# Altium PCB Temp_sense_Project 2.0(right angle.PcbDoc (part 3 of 5)
Units mm, origin at the board's own origin, x right, y up, seen from the top; angles counter-clockwise.
Board outline 238.12 x 109.47 mm, 4 copper layers (Top Layer, Layer 1, Layer 2, Bottom Layer), stack 0.603 mm thick; 185 components, 161 nets, 944 pads, 283 vias.
Unrouted connection lines stored in the file: 2.
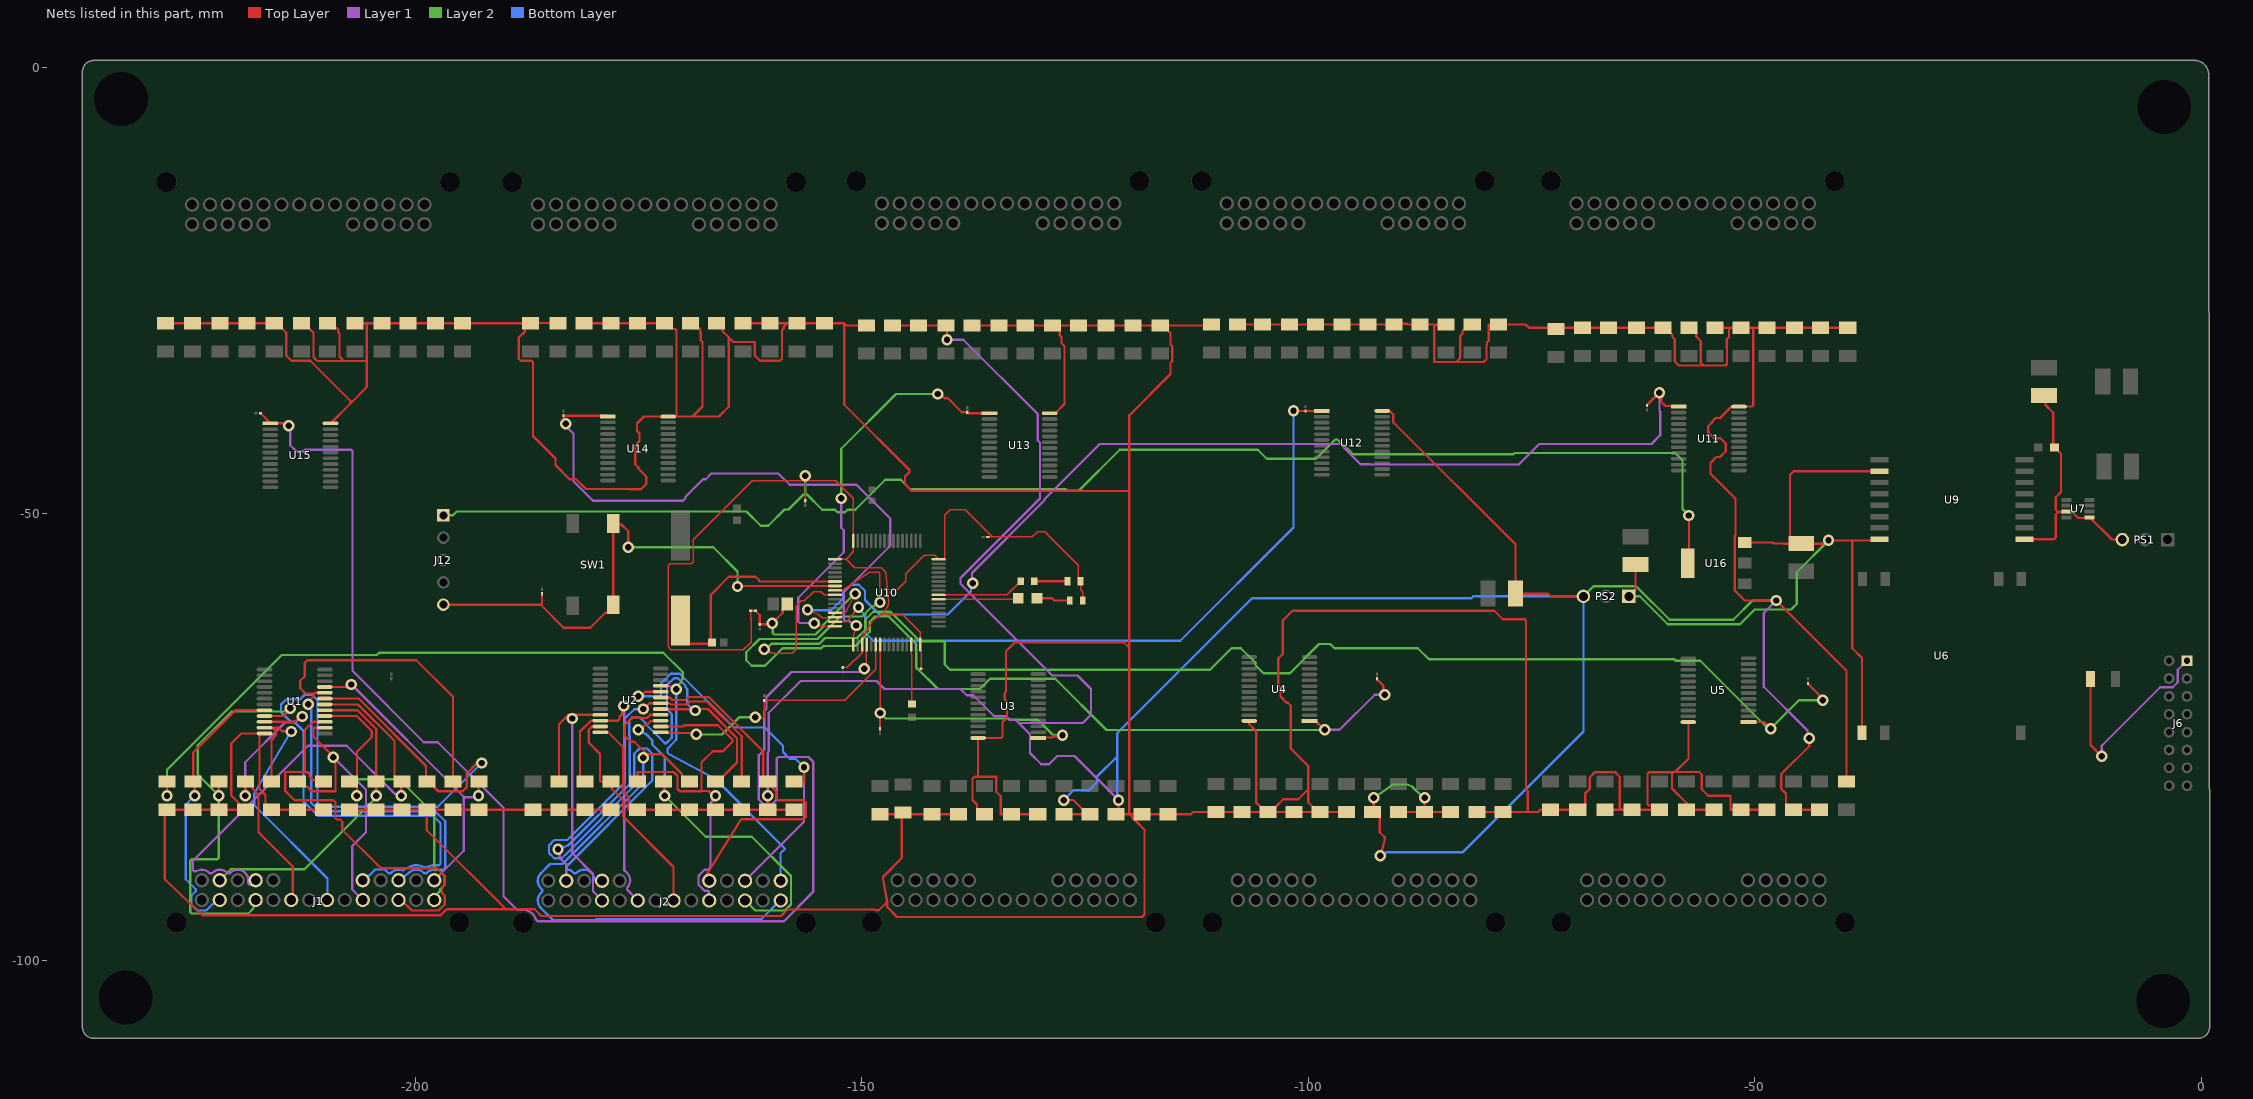
[diagram p4: the nets of this part, all layers, seen from the top]

## Via types
v1: diameter 1.27, hole 0.711, Top Layer to Bottom Layer, 278 vias
v2: diameter 0.711, hole 0.711, Top Layer to Bottom Layer, 4 vias
v3: diameter 1, hole 0.711, Top Layer to Bottom Layer, 1 vias

## Nets (pads, with @x,y where several pads share a name; then routed paths per layer and width w, separated by ;. In a path a pad name is that pad's centre, name@x,y a point inside that pad or via, vN(x,y) a via of type N, cw(c..) or ccw(c..) an arc to the next point about the centre after c; other vN are vias at no path point) (continued)
NetC4_1: C4.1 U2.1 U10.22 | length 30.9
  Top Layer w0.15: v1(-161.916,-72.78) -161.853,-72.843 -160.988,-72.843 -160.9,-72.755 C4.1@-160.9,-70.876 -151.987,-70.876 -151.925,-70.876 -151.461,-70.419 ccw(c-152.137,-69.732) -151.454,-70.412 -148.454,-67.405 -148.454,-65.313 -148.448,-65.307 U10.22@-148.448,-64.785
  Top Layer w0.254: U2.1@-172.511,-74.45 -172.43,-74.53 -168.675,-74.53 v1(-168.52,-74.685)
  Layer 2 w0.254: v1(-168.52,-74.685) -165.627,-74.685 -163.722,-72.78 v1(-161.916,-72.78)
NetC5_1: C5.1 U3.1 U10.23 | length 33.7
  Top Layer w0.15: v1(-147.94,-72.297) U10.23@-147.94,-64.616
  Top Layer w0.254: C5.1@-147.946,-74.05 -147.946,-73.389 -147.94,-73.382 v1(-147.94,-72.297) ; U3.1@-130.22,-75.085 -130.158,-75.024 -128.672,-75.024 -128.545,-74.897 -127.643,-74.897 v1(-127.529,-74.782)
  Layer 2 w0.254: v1(-147.94,-72.297) -147.911,-72.297 -147.312,-72.896 -133.566,-72.896 -133.428,-73.034 -130.293,-73.034 -128.689,-74.637 -128.615,-74.712 v1(-127.529,-74.782)
NetC6_1: C6.1 U4.1 U10.8 | length 115.4
  Top Layer w0.15: U10.8@-152.99,-58.566 -152.34,-58.566 -152.141,-58.545 -149.16,-56.534 -148.095,-56.534 -148.007,-56.622 v1(-147.944,-59.892)
  Top Layer w0.254: U4.1@-99.867,-73.18 -99.198,-73.18 -98.201,-74.177 v1(-98.162,-74.177) ; C6.1@-92.32,-68.463 -92.32,-68.508 -91.604,-69.224 -91.604,-70.067 v1(-91.431,-70.24)
  Layer 1 w0.254: v1(-98.162,-74.177) -96.511,-74.177 -92.574,-70.24 v1(-91.431,-70.24)
  Layer 2 w0.254: v1(-147.944,-59.892) -148.219,-59.892 -148.788,-60.461 -148.922,-60.461 -149.938,-61.477 -152.408,-61.477 -154.948,-64.017 -161.448,-64.017 -162.916,-65.485 -162.916,-66.399 -162.321,-66.994 -160.821,-66.994 -158.86,-65.033 -154.527,-65.033 -154.273,-64.779 -150.691,-64.779 -149.102,-63.19 -149.102,-63.137 -149.089,-63.124 -149.089,-62.065 -148.501,-61.477 -146.979,-61.477 -143.882,-64.574 -143.882,-67.192 -141.469,-69.605 -136.783,-69.605 -135.64,-68.462 -128.341,-68.462 -122.6,-74.202 -98.187,-74.202 v1(-98.162,-74.177)
NetC7_1: C7.1 U5.1 U10.9 | length 153.2
  Top Layer w0.15: v1(-160.9,-65.16) -160.604,-65.16 -160.144,-65.62 -157.789,-65.62 -157.343,-65.174 -157.343,-60.941 -157.343,-60.316 -156.778,-59.751 -156.413,-59.751 -155.369,-58.707 -154.564,-58.707 -154.205,-59.066 U10.9@-152.99,-59.066
  Top Layer w0.254: U5.1@-50.718,-73.307 -48.994,-73.307 v1(-48.251,-74.05) ; C7.1@-44.06,-68.971 -44.06,-69.016 -42.409,-70.667 v1(-42.409,-70.875)
  Layer 2 w0.254: v1(-160.9,-65.16) -160.733,-65.16 -160.098,-64.525 -154.737,-64.525 -154.101,-63.888 -150.519,-63.888 -149.597,-62.966 -149.597,-61.854 -148.712,-60.969 -146.769,-60.969 -143.467,-64.271 -140.856,-64.271 -140.707,-64.42 -140.707,-66.851 -140.112,-67.446 -111.017,-67.446 -108.604,-65.033 -107.556,-65.033 -106.193,-66.396 -105.909,-66.68 -105.909,-66.934 -105.016,-67.827 -102.059,-67.827 -98.799,-64.567 -97.537,-64.567 -97.071,-65.033 -87.744,-65.033 -86.496,-66.281 -59.006,-66.281 -58.857,-66.43 -56.125,-66.43 -48.505,-74.05 v1(-48.251,-74.05) -45.076,-70.875 v1(-42.409,-70.875)
NetC8_1: C8.1 U10.14 U11.1 | length 125.1
  Top Layer w0.15: v1(-156.074,-60.715) -156.074,-60.776 v1@-156.104,-60.806 ; U10.14@-153.153,-61.558 -153.17,-61.575 -153.759,-61.575 -153.788,-61.604 -154.318,-61.604 -154.423,-61.604 -154.889,-61.208 ; v1@-156.104,-60.806 -154.889,-61.208 ; v1@-156.104,-60.806 -154.889,-61.208
  Top Layer w0.254: C8.1@-62.094,-37.855 -62.09,-37.85 -62.09,-37.805 -60.743,-36.458 v1(-60.697,-36.458) -60.503,-36.652 -60.503,-37.44 -60.021,-37.922 -58.605,-37.922 U11.1@-58.538,-37.989
  Layer 1 w0.254: v1(-137.569,-57.758) -137.659,-57.668 -137.659,-56.615 -129.531,-48.487 -129.531,-48.356 -123.348,-42.173 -96.406,-42.173 -94.149,-44.43 -93.107,-44.43 -93.078,-44.459 -76.434,-44.459 -74.148,-42.173 -61.586,-42.173 -60.595,-41.182 -60.595,-38.547 -60.697,-38.445 v1(-60.697,-36.458)
  Bottom Layer w0.254: v1(-156.074,-60.715) -156,-60.789 -153.406,-60.789 -152.056,-59.439 -152.056,-58.816 -151.161,-57.921 -150.319,-57.921 -149.629,-58.611 -149.629,-59.644 -148.005,-61.267 -140.37,-61.267 -137.763,-58.66 -137.763,-57.952 v1(-137.569,-57.758)
NetC9_1: C9.1 U10.15 U12.1 | length 89
  Top Layer w0.15: U10.15@-152.99,-62.066 -151.725,-62.066 -151.665,-62.066 -151.577,-61.978 v1(-150.359,-60.461)
  Top Layer w0.254: v1(-101.667,-38.471) U12.1@-98.489,-38.471 ; v1(-101.667,-38.471) U12.1@-98.489,-38.471 ; v1(-101.667,-38.471) C9.1@-100.321,-38.471 ; v1(-101.667,-38.471) C9.1@-100.321,-38.471 ; v1(-101.667,-38.471) C9.1@-100.321,-38.471 ; C9.1@-100.321,-38.471 U12.1@-98.489,-38.471 ; C9.1@-100.321,-38.471 U12.1@-98.489,-38.471 ; C9.1@-100.321,-38.471 U12.1@-98.489,-38.471
  Bottom Layer w0.254: v1(-150.359,-60.461) -150.359,-60.592 -149.597,-61.354 -149.597,-63.295 -148.697,-64.195 -114.328,-64.195 -101.667,-51.534 v1(-101.667,-38.471)
NetC10_1: C10.1 U10.16 U13.1 | length 51
  Top Layer w0.15: v1(-155.31,-62.224) -155.035,-62.224 -154.661,-62.597 -153.585,-62.597 -153.585,-62.587 -153.011,-62.587 U10.16@-152.99,-62.566
  Top Layer w0.254: v1(-141.476,-36.585) -141.202,-36.585 -140.719,-37.068 -140.343,-37.068 -138.793,-38.618 C10.1@-138.171,-38.618 ; C10.1@-138.171,-38.663 C10.1@-138.171,-38.618 ; C10.1@-138.171,-38.663 -138.167,-38.668 C10.1@-138.167,-38.725 ; C10.1@-138.171,-38.663 C10.1@-138.171,-38.618 ; C10.1@-138.171,-38.663 C10.1@-138.171,-38.618 ; C10.1@-138.167,-38.725 U13.1@-135.7,-38.725 ; C10.1@-138.167,-38.725 U13.1@-135.7,-38.725 ; C10.1@-138.167,-38.725 U13.1@-135.7,-38.725
  Layer 1 w0.254: v1(-155.31,-62.224) -156.941,-62.224 -157.09,-62.075 -157.09,-59.382 -152.01,-54.302 -152.01,-51.824 -152.284,-51.55 v1(-152.284,-48.269)
  Layer 2 w0.254: v1(-152.284,-48.269) -152.284,-42.701 -146.168,-36.585 v1(-141.476,-36.585)
NetC11_1: C11.1 U10.17 U14.1 | length 86.2
  Top Layer w0.15: U10.17@-150.94,-64.616 -150.94,-63.966 -150.919,-63.768 v1(-150.613,-62.493)
  Top Layer w0.254: v1(-183.139,-39.924) -183.139,-39.649 -183.383,-39.405 -183.383,-39.048 -183.379,-39.044 C11.1@-183.379,-39.022 ; U14.1@-178.413,-39.106 -178.493,-39.026 -179.307,-39.026 -179.311,-39.022 ; C11.1@-183.379,-39.022 -179.311,-39.022 ; C11.1@-183.379,-39.022 -179.311,-39.022 ; C11.1@-183.379,-39.022 -179.311,-39.022 ; C11.1@-183.379,-39.022 -179.311,-39.022 ; C11.1@-183.379,-39.022 -179.311,-39.022
  Layer 1 w0.254: v1(-183.139,-39.924) -183.139,-40.15 -182.259,-41.03 -182.259,-46.341 -180.077,-48.523 -170.004,-48.523 -169.723,-48.242 -169.723,-48.079 -167.754,-46.11 -167.464,-46.11 -166.829,-45.475 -159.336,-45.475 -158.066,-46.745 -150.573,-46.745 -146.803,-50.515 -146.803,-53.563 -152.01,-58.77 -152.01,-61.802 -151.83,-61.982 -151.399,-61.982 -150.888,-62.493 v1(-150.613,-62.493)
NetC12_1: C12.1 U10.20 U15.1 | length 165.6
  Top Layer w0.15: v1(-149.724,-67.319) -149.51,-67.105 -149.51,-66.711 -149.47,-66.671 -149.47,-65.431 -149.448,-65.41 -149.448,-64.796 U10.20@-149.432,-64.779
  Top Layer w0.254: C12.1@-217.287,-38.744 -216.272,-39.759 -216.272,-39.814 U15.1@-216.157,-39.93 ; v1(-214.148,-40.142) -214.423,-40.142 -214.697,-39.868 U15.1@-216.095,-39.868 ; U15.1@-216.157,-39.93 U15.1@-216.095,-39.868 ; U15.1@-216.157,-39.93 U15.1@-216.095,-39.868 ; U15.1@-216.157,-39.93 U15.1@-216.095,-39.868
  Layer 1 w0.254: v1(-214.148,-40.142) -213.986,-40.304 -213.986,-42.304 -213.317,-42.973 -212.475,-42.973 -212.31,-42.808 -207.15,-42.808 -207.001,-42.957 -207.001,-67.573 -199.02,-75.554 -197.465,-75.554 -190.11,-82.909 -190.11,-92.795 -188.592,-94.314 -188.585,-94.32 -188.375,-94.32 ; v1(-149.724,-67.319) -150.105,-67.7 -157.852,-67.7 -160.646,-70.494 -160.646,-71.808 -160.9,-72.062 -160.9,-76.399 -161.535,-77.034 -161.535,-81.964 -160.94,-82.559 -160.098,-82.559 -159.503,-81.964 -159.503,-77.374 -159.354,-77.225 -155.947,-77.225 -155.439,-77.733 -155.439,-92.338 -158.69,-95.589 -186.241,-95.589 -186.296,-95.589 -186.445,-95.44 -186.574,-95.17 ; -188.375,-94.32 -187.929,-94.319 ; -188.375,-94.32 -187.929,-94.319 ; -188.375,-94.32 -187.929,-94.319 ; -187.929,-94.319 cw(c-187.926,-95.818) -186.574,-95.17 ; -187.929,-94.319 cw(c-187.926,-95.818) -186.574,-95.17 ; -187.929,-94.319 cw(c-187.926,-95.818) -186.574,-95.17
NetC13_2: C13.2 U10.6 Y1.1 | length 41.4
  Top Layer w0.254: Y1.1@-170.298,-61.909 Y1.1@-170.298,-63.624 ; C13.2@-167.16,-64.55 -167.036,-64.55 C13.2@-166.884,-64.398 ; C13.2@-167.055,-64.1 C13.2@-167.011,-64.144 ; U10.6@-152.99,-57.566 -161.386,-57.566 -161.535,-57.417 -161.535,-57.373 -161.876,-57.032 -164.877,-57.032 -166.884,-59.039 ; Y1.1@-170.298,-64.55 Y1.1@-169.375,-64.55 ; Y1.1@-170.298,-64.55 Y1.1@-170.298,-63.624 ; Y1.1@-170.298,-64.55 Y1.1@-169.375,-64.55 ; Y1.1@-170.298,-64.55 Y1.1@-169.375,-64.55 ; Y1.1@-170.298,-63.624 -169.375,-64.547 -167.16,-64.547 C13.2@-167.011,-64.398 ; C13.2@-167.011,-64.398 C13.2@-167.011,-64.144 ; C13.2@-167.011,-64.398 C13.2@-167.011,-64.144 ; C13.2@-167.011,-64.398 C13.2@-167.011,-64.144 ; C13.2@-166.884,-64.398 -166.884,-59.039 ; C13.2@-166.884,-64.398 -166.884,-59.039 ; C13.2@-166.884,-64.398 -166.884,-59.039
NetC14_1: C14.1 J12.5 SW1.1 SW1.2 U10.7 | length 73
  Top Layer w0.254: J12.5@-196.841,-60.167 -190.531,-60.167 -190.513,-60.185 -185.941,-60.185 ; C14.1@-185.792,-58.938 -185.792,-60.036 -185.941,-60.185 ; v1(-176.14,-53.73) -176.14,-51.946 -176.895,-51.191 -177.721,-51.191 SW1.1@-177.827,-51.085 -177.827,-51.435 SW1.2@-177.827,-60.185 -177.827,-60.502 -178.4,-61.075 -178.717,-61.075 -180.389,-62.747 -183.379,-62.747 -185.941,-60.185 ; v1(-163.897,-58.125) v1@-163.847,-58.074 ; U10.7@-153.598,-58.074 U10.7@-152.99,-58.074 ; v1@-163.847,-58.074 U10.7@-152.99,-58.074 ; v1@-163.847,-58.074 U10.7@-152.99,-58.074
  Layer 2 w0.254: v1(-176.14,-53.73) -166.615,-53.73 -163.897,-56.448 v1(-163.897,-58.125)
NetC15_2: C15.2 C16.1 FB1.2 U10.13 | length 22
  Top Layer w0.15: U10.13@-152.99,-61.066 -151.871,-61.066 -151.783,-60.978 v1(-150.74,-58.937)
  Top Layer w0.254: FB1.2@-161.915,-60.842 -161.408,-61.349 C16.1@-161.408,-62.366 -160.138,-62.366 -158.845,-61.073 -158.845,-60.603 C15.2@-158.322,-60.08
  Layer 2 w0.254: v1(-160.011,-62.239) -159.949,-62.301 -159.949,-63.36 -159.801,-63.509 -155.158,-63.509 -154.294,-62.645 -154.294,-62.425 -150.805,-58.937 v1(-150.74,-58.937)
NetC17_1: C17.1 U10.30 | length 6.7
  Top Layer w0.15: U10.30@-144.44,-64.616 -144.44,-65.693 -144.39,-65.743 C17.1@-144.39,-71.268
NetC18_1: C18.1 C21.1 C25.1 C26.1 FB1.1 J12.1 R122.1 R123.1 U10.1 U10.19 U10.32 U10.48 U10.64 U16.4 | length 306
  Top Layer w0.15: FB1.1@-162.424,-60.842 -162.424,-61.731 -162.349,-61.806 -162.349,-64.345 -163.233,-65.229 -171.367,-65.229 -171.555,-65.041 -171.555,-64.967 -171.677,-64.845 -171.677,-55.8 -171.467,-55.59 -169.09,-55.59 -168.867,-55.367 -168.867,-52.902 -162.238,-46.273 ; C26.1@-156.328,-48.523 v1@-156.328,-46.273 ; v1(-156.328,-45.729) v1@-156.328,-46.273 ; U10.1@-152.99,-55.066 -151.756,-55.066 ; C18.1@-152.137,-67.192 -151.617,-67.192 -149.961,-65.536 -149.961,-64.637 U10.19@-149.94,-64.616 -149.94,-63.966 -149.892,-63.741 -148.889,-62.146 cw(c-148.073,-62.66) -148.63,-61.873 -147.703,-61.215 -147.579,-61.215 ; C21.1@-143.374,-67.319 -143.374,-67.273 -143.37,-67.269 -143.37,-67.186 -143.348,-67.163 -143.348,-65.371 -143.44,-65.278 U10.32@-143.44,-64.616 -143.44,-63.25 -145.474,-61.215 -147.579,-61.215 ; R122.1@-125.25,-59.699 -125.25,-58.759 -125.504,-58.505 R123.1@-125.504,-57.54 -125.754,-57.29 -125.754,-55.763 -129.513,-52.004 -130.311,-52.004 -130.894,-52.587 -135.373,-52.587 ; -162.238,-46.273 v1@-156.328,-46.273 ; -162.238,-46.273 v1@-156.328,-46.273 ; -162.238,-46.273 v1@-156.328,-46.273 ; v1@-156.328,-46.273 -152.916,-46.273 ; v1@-156.328,-46.273 -152.916,-46.273 ; v1@-156.328,-46.273 -152.916,-46.273 ; -152.916,-46.273 -150.94,-48.25 U10.64@-150.94,-53.016 -150.94,-54.25 -151.756,-55.066 ; -151.756,-55.066 -150.796,-56.026 -147.823,-56.026 -147.311,-56.538 -147.161,-58.345 -147.161,-58.469 ; -147.579,-61.215 -147.491,-61.003 -147.12,-60.392 ccw(c-147.944,-59.892) -146.988,-59.764 -147.161,-58.469 ; -147.161,-58.469 -147.074,-58.469 -145.953,-58.425 -145.093,-57.565 -145.093,-56.72 -142.993,-54.619 -141.837,-54.619 U10.48@-141.39,-55.066 -140.859,-55.066 -140.707,-54.914 -140.707,-50.134 -140.112,-49.539 -138.421,-49.539 -135.373,-52.587 ; C25.1@-135.881,-52.587 -135.373,-52.587 ; C25.1@-135.881,-52.587 -135.373,-52.587 ; C25.1@-135.881,-52.587 -135.373,-52.587
  Top Layer w0.254: U16.4@-57.547,-55.508 -57.395,-55.356 v1(-57.395,-50.174)
  Layer 2 w0.254: J12.1@-196.841,-50.167 -195.778,-50.167 -195.337,-49.726 -162.892,-49.726 -161.301,-51.317 -160.459,-51.317 -158.651,-49.509 -158.203,-49.509 -156.518,-47.825 -156.328,-47.825 ; v1(-156.328,-45.729) -156.328,-47.825 ; v1(-57.395,-50.174) -58.126,-49.443 -58.126,-43.982 -58.919,-43.189 -76.899,-43.189 -77.026,-43.316 -95.005,-43.316 -95.924,-42.397 -96.033,-42.397 -96.765,-41.665 -96.983,-41.665 -99.142,-43.824 -104.643,-43.824 -105.659,-42.808 -121.109,-42.808 -125.681,-47.38 -127,-47.38 -127.127,-47.253 -144.557,-47.253 -145.621,-46.189 -147.374,-46.189 -150.724,-49.539 -151.589,-49.539 -151.863,-49.813 -152.705,-49.813 -152.979,-49.539 -154.423,-49.539 -156.137,-47.825 -156.328,-47.825
NetC19_2: C19.2 C22.2 PS2.1 U6.9 U9.10 U9.16 U16.3 | length 94
  Top Layer w0.254: PS2.1@-64.126,-59.227 -63.364,-58.465 C19.2@-63.364,-55.661 ; U16.3@-51.147,-53.208 -48.048,-53.208 -47.933,-53.323 -46.782,-53.323 -46.756,-53.349 C22.2@-45.241,-53.349 ; C22.2@-44.822,-53.323 -45.241,-53.323 -45.368,-53.323 -46.092,-52.598 -46.092,-45.624 -45.689,-45.221 U9.10@-36.059,-45.221 ; U6.9@-38.028,-74.507 -38.028,-66.128 -39.107,-65.049 -39.107,-53.117 -38.958,-52.968 ; U9.16@-36.059,-52.841 -36.186,-52.968 -38.958,-52.968 ; C22.2@-44.822,-53.349 -42.43,-53.349 ; C22.2@-44.822,-53.349 -42.43,-53.349 ; C22.2@-44.822,-53.349 -42.43,-53.349 ; -42.43,-53.349 -42.049,-52.968 v1(-41.774,-52.968) -38.958,-52.968
  Layer 2 w0.254: PS2.1@-64.126,-59.227 -62.896,-59.227 -59.757,-62.366 -51.68,-62.366 -50.029,-60.715 -45.965,-60.715 -45.33,-60.08 -45.33,-56.524 v1(-41.774,-52.968)
NetC20_1: C20.1 PS2.3 R1.1 R2.1 R3.1 R4.1 R5.1 R6.1 R7.1 R8.1 R9.1 R10.1 R11.1 R12.1 R13.1 R14.1 R15.1 R16.1 R17.1 R18.1 R19.1 R20.1 R21.1 R22.1 R23.1 R24.1 R25.1 R26.1 R27.1 R28.1 R29.1 R30.1 R31.1 R32.1 R33.1 R34.1 R35.1 R36.1 R37.1 R38.1 R39.1 R40.1 R41.1 R42.1 R43.1 R44.1 R45.1 R46.1 R47.1 R48.1 R49.1 R50.1 R51.1 R52.1 R53.1 R54.1 R55.1 R56.1 R57.1 R58.1 R59.1 R60.1 R61.1 R62.1 R63.1 R64.1 R65.1 R66.1 R67.1 R68.1 R69.1 R70.1 R71.1 R72.1 R73.1 R74.1 R75.1 R76.1 R77.1 R78.1 R79.1 R80.1 R81.1 R82.1 R83.1 R84.1 R85.1 R86.1 R87.1 R88.1 R89.1 R90.1 R91.1 R92.1 R93.1 R94.1 R95.1 R96.1 R97.1 R98.1 R99.1 R100.1 R101.1 R102.1 R103.1 R104.1 R105.1 R106.1 R107.1 R108.1 R109.1 R110.1 R111.1 R112.1 R113.1 R114.1 R115.1 R116.1 R117.1 R118.1 R119.1 R120.1 U1.24 U2.24 U3.24 U4.24 U5.24 U11.24 U12.24 U13.24 U14.24 U15.24 | length 1439.1
  Top Layer w0.254: R109.1@-227.956,-28.66 R110.1@-224.908,-28.66 R111.1@-221.86,-28.66 R112.1@-218.812,-28.66 -215.488,-28.66 -214.418,-29.73 -214.418,-32.278 -213.827,-32.869 -211.733,-32.869 -207.255,-37.347 -207.255,-37.658 ; U1.24@-216.853,-74.577 U1.24@-217.466,-74.577 ; R114.1@-212.716,-28.66 -212.44,-28.66 -211.382,-29.718 -211.382,-32.433 -210.938,-32.877 -207.978,-32.877 ; R7.1@-210.24,-83.118 R8.1@-213.161,-83.118 R9.1@-216.082,-83.118 R9.1@-216.755,-83.118 ; R115.1@-209.795,-28.66 -209.244,-29.21 -208.738,-29.21 -208.589,-29.359 -208.589,-29.705 -208.461,-29.834 -208.461,-32.394 -207.978,-32.877 ; U15.24@-209.468,-39.868 -209.465,-39.868 -207.255,-37.658 ; R6.1@-207.319,-83.118 R5.1@-204.398,-83.118 R4.1@-201.477,-83.118 R3.1@-198.683,-83.118 ; R116.1@-206.747,-28.66 -205.401,-28.66 ; R98.1@-184.014,-28.66 R98.1@-184.497,-28.66 ; R99.1@-181.093,-28.66 R102.1@-172.076,-28.66 -171.25,-29.21 -170.891,-29.314 -170.742,-29.463 -170.742,-39.093 -170.755,-39.106 ; U2.24@-179.261,-74.45 -178.382,-74.45 -176.699,-76.133 -176.699,-81.111 -176.089,-81.721 ; R21.1@-178.045,-83.118 R22.1@-180.966,-83.118 R23.1@-183.887,-83.118 R24.1@-186.808,-83.118 R1.1@-192.841,-83.118 R2.1@-195.762,-83.118 R3.1@-198.683,-83.118 ; R103.1@-169.155,-28.66 -168.604,-29.21 -168.225,-29.21 -168.076,-29.359 -168.076,-29.705 -168.012,-29.769 -168.012,-30.552 -167.821,-30.743 -167.821,-37.982 -168.945,-39.106 ; R104.1@-166.234,-28.66 R104.1@-165.574,-28.66 ; R105.1@-163.313,-28.66 R106.1@-160.265,-28.66 -158.36,-28.66 ; v1(-160.519,-81.543) R15.1@-160.519,-83.118 ; R14.1@-157.598,-83.118 R15.1@-160.519,-83.118 ; R85.1@-149.47,-28.914 -151.705,-28.914 -151.959,-28.66 ; R36.1@-147.946,-83.626 R35.1@-145.572,-83.626 ; R86.1@-146.549,-28.914 R87.1@-143.628,-28.914 R88.1@-140.58,-28.914 -140.453,-29.041 v1(-140.453,-30.498) ; R33.1@-139.183,-83.626 R34.1@-142.104,-83.626 R35.1@-145.025,-83.626 ; R89.1@-137.659,-28.914 R90.1@-134.611,-28.914 R91.1@-131.69,-28.914 R92.1@-128.642,-28.914 R92.1@-128.366,-28.914 ; U3.24@-136.973,-75.088 -136.973,-79.417 ; U3.24@-136.97,-75.085 -134.379,-75.085 -134.23,-74.936 -134.23,-73.33 -133.722,-72.822 -133.722,-71.042 -133.976,-70.788 -133.976,-70.039 -133.836,-69.899 -133.836,-67.459 -133.849,-67.446 -133.849,-65.374 -132.847,-64.373 -130.375,-64.373 -130.367,-64.364 -129.525,-64.364 -129.517,-64.373 -120.666,-64.373 -120.057,-64.982 ; R32.1@-136.262,-83.626 -136.537,-83.626 -137.088,-83.076 -137.088,-82.539 -137.596,-82.031 -137.596,-79.64 -137.373,-79.417 -136.973,-79.417 ; R30.1@-130.293,-83.626 R31.1@-133.214,-83.626 -134.42,-83.626 -134.42,-81.611 -134.928,-81.103 -134.928,-79.435 -134.935,-79.417 -136.973,-79.417 ; U13.24@-128.95,-38.725 -128.337,-38.725 -127.308,-37.696 -127.308,-31.229 -127.636,-30.901 -127.636,-30.195 -127.816,-30.015 -127.816,-29.464 R92.1@-128.366,-28.914 ; R29.1@-127.372,-83.626 R28.1@-124.726,-83.626 ; v1(-127.372,-82.042) -126.311,-82.042 R28.1@-124.726,-83.626 ; R28.1@-124.451,-83.626 R28.1@-124.726,-83.626 ; R27.1@-121.53,-83.626 R27.1@-121.403,-83.626 ; v1(-121.245,-82.042) -121.245,-83.468 R27.1@-121.403,-83.626 ; -120.057,-83.626 -120.057,-64.982 ; R96.1@-116.298,-28.914 -110.989,-28.914 R73.1@-110.862,-28.787 ; R74.1@-107.941,-28.787 R76.1@-102.099,-28.787 R77.1@-99.178,-28.787 R78.1@-96.257,-28.787 R79.1@-93.336,-28.787 R80.1@-90.415,-28.787 -90.351,-28.723 -88.942,-28.723 ; U4.24@-106.617,-73.18 -106.617,-73.542 -105.846,-74.313 -105.846,-82.314 R46.1@-105.338,-82.822 ; R43.1@-95.749,-83.372 R44.1@-98.67,-83.372 R44.1@-98.924,-83.372 ; v1(-92.67,-81.788) -92.67,-83.214 R42.1@-92.828,-83.372 -92.552,-83.372 -92.002,-83.923 -92.002,-85.65 -91.505,-86.147 -91.431,-86.221 -91.431,-86.432 v1(-91.939,-88.274) ; U12.24@-91.739,-38.471 -91.708,-38.502 -90.925,-38.502 -90.895,-38.533 -90.826,-38.533 -90.481,-38.877 -90.481,-39.728 -76.8,-53.41 C20.1@-76.8,-58.937 -73.168,-58.937 -72.878,-59.227 PS2.3@-69.206,-59.227 ; R41.1@-89.907,-83.372 R40.1@-86.986,-83.372 R40.1@-86.562,-83.372 ; -88.942,-28.792 -88.289,-28.792 -88.289,-28.787 -85.614,-28.787 ; v1(-86.986,-81.788) R40.1@-86.986,-82.949 ; R82.1@-84.573,-28.787 -85.614,-28.787 ; R39.1@-84.065,-83.372 R40.1@-86.562,-83.372 ; R83.1@-81.652,-28.787 -82.203,-29.337 -82.582,-29.337 -82.731,-29.486 -82.731,-29.832 -82.986,-30.088 -82.986,-32.56 -83.43,-33.004 ; R38.1@-81.144,-83.372 R37.1@-78.223,-83.372 -75.429,-83.372 ; R58.1@-66.793,-83.118 -64.888,-83.118 ; R56.1@-60.697,-83.118 R56.1@-61.408,-83.118 ; U5.24@-57.468,-73.307 U5.24@-57.446,-73.307 ; R66.1@-57.395,-29.168 -57.119,-29.168 -56.569,-29.718 -56.569,-30.132 -56.061,-30.64 -56.061,-33.068 -55.744,-33.385 ; R54.1@-54.601,-83.118 R55.1@-57.649,-83.118 -57.649,-82.381 -59.3,-80.73 -59.3,-79.05 -59.159,-78.909 ; R67.1@-54.474,-29.168 -52.899,-29.168 ; -53.951,-39.276 -54.41,-39.276 -54.766,-39.632 -54.766,-39.711 -55.236,-40.181 -55.236,-40.863 -54.561,-41.538 -53.863,-41.538 -53.268,-42.133 -53.268,-42.975 -53.927,-43.634 -54.323,-43.634 -54.982,-44.292 -54.982,-45.516 -52.19,-48.308 -52.19,-52.362 -52.278,-52.45 -52.278,-58.566 -51.145,-59.699 v1(-47.616,-59.699) -39.742,-67.573 R49.1@-39.742,-79.968 ; -53.926,-39.276 -52.682,-38.033 ; -52.664,-38.051 -52.653,-38.051 -52.622,-38.02 -51.818,-38.02 U11.24@-51.788,-37.989 -50.356,-37.989 -50.207,-37.84 -50.207,-29.168 ; R52.1@-48.632,-83.118 R53.1@-51.553,-83.118 -52.747,-83.118 -52.747,-81.543 -55.236,-81.543 -55.947,-80.832 -55.947,-79.206 -56.252,-78.901 -58.944,-78.901 ; R51.1@-45.711,-83.118 -45.986,-83.118 -46.537,-82.568 -46.537,-81.311 -47.045,-80.803 -47.045,-79.132 -43.933,-76.02 v1(-43.933,-75.102) ; R51.1@-45.686,-83.118 R50.1@-42.79,-83.118 ; R72.1@-39.615,-29.168 R71.1@-42.663,-29.168 R70.1@-45.584,-29.168 R69.1@-48.632,-29.168 -50.207,-29.168 ; -228.032,-90.89 R13.1@-228.032,-83.118 ; -228.032,-90.89 -227.906,-91.016 -223.797,-94.928 -197.145,-94.928 -196.485,-94.268 -189.831,-94.268 ; -228.032,-90.89 R13.1@-228.032,-83.118 ; -228.032,-90.89 R13.1@-228.032,-83.118 ; R13.1@-228.032,-83.118 R13.1@-227.766,-83.118 R12.1@-224.845,-83.118 R11.1@-221.924,-83.118 R10.1@-219.003,-83.118 -220.59,-81.532 -220.59,-75.714 -219.453,-74.577 U1.24@-217.466,-74.577 ; U1.24@-217.466,-74.577 -217.416,-74.627 -217.416,-80.803 -216.755,-81.465 ; R9.1@-216.755,-83.118 -216.755,-81.465 ; R9.1@-216.755,-83.118 -216.755,-81.465 ; R9.1@-216.755,-83.118 -216.755,-81.465 ; -207.978,-32.877 -205.401,-32.877 ; -207.255,-37.658 -205.401,-35.804 -205.401,-32.877 ; -205.401,-32.877 -205.401,-28.66 ; -205.401,-28.66 R117.1@-203.699,-28.66 R118.1@-200.778,-28.66 R119.1@-197.73,-28.66 R120.1@-194.682,-28.66 R97.1@-187.156,-28.66 ; R3.1@-198.683,-83.118 -198.683,-85.416 -189.831,-94.268 ; -189.831,-94.268 -186.605,-94.268 -185.868,-95.005 -159.02,-95.005 -158.333,-94.317 ; R97.1@-187.156,-28.66 -187.706,-29.21 -187.706,-29.569 -188.396,-30.259 -188.396,-32.646 -188.173,-32.869 -186.957,-32.869 -186.808,-33.018 -186.808,-41.284 -184.291,-43.801 -184.291,-44.522 -182.699,-46.114 -181.978,-46.114 -180.877,-47.215 -175.908,-47.215 -175.87,-47.253 -174.703,-47.253 -174.108,-46.658 -174.108,-45.816 -174.703,-45.221 -175.026,-44.899 -175.026,-44.771 -175.348,-44.449 -175.348,-42.31 -174.87,-41.832 -174.87,-40.99 -175.145,-40.715 -175.145,-39.875 -174.376,-39.106 U14.24@-171.662,-39.106 -170.755,-39.106 ; R97.1@-187.156,-28.66 R97.1@-187.062,-28.66 -187.037,-28.635 R98.1@-184.497,-28.635 ; R98.1@-184.497,-28.66 R98.1@-184.497,-28.635 ; R98.1@-184.497,-28.66 R98.1@-184.497,-28.635 ; R98.1@-184.497,-28.66 R98.1@-184.497,-28.635 ; -176.089,-83.118 -176.089,-81.721 ; -176.089,-83.118 R20.1@-175.124,-83.118 R19.1@-172.203,-83.118 R18.1@-169.282,-83.118 R17.1@-166.361,-83.118 R16.1@-163.44,-83.118 R15.1@-160.519,-83.118 ; -176.089,-83.118 -176.089,-81.721 ; -176.089,-83.118 -176.089,-81.721 ; -170.755,-39.106 -168.945,-39.106 ; -168.945,-39.106 -165.98,-39.106 -164.888,-38.014 -164.888,-30.235 ; -165.574,-29.549 R104.1@-165.574,-28.66 ; -165.574,-29.549 R104.1@-165.574,-28.66 ; -165.574,-29.549 -164.888,-30.235 ; -165.574,-29.549 R104.1@-165.574,-28.66 ; -164.888,-30.235 -164.371,-30.752 -161.979,-30.752 -161.979,-32.266 -161.376,-32.869 -159.154,-32.869 -158.931,-32.646 -158.931,-29.432 -158.741,-29.242 -158.741,-29.041 -158.36,-28.66 ; -158.36,-28.66 R107.1@-157.217,-28.66 R108.1@-154.169,-28.66 -151.959,-28.66 ; -158.333,-94.317 -148.843,-94.268 ; -158.333,-94.317 -148.843,-94.268 ; -158.333,-94.317 -148.843,-94.268 ; -151.959,-28.66 -151.959,-37.779 -144.642,-45.096 -144.642,-45.306 -145.152,-45.816 -145.152,-46.658 -144.385,-47.425 -120.057,-47.425 ; -148.843,-94.268 cw(c-148.835,-95.767) -148.311,-94.363 ; -148.843,-94.268 cw(c-148.835,-95.767) -148.311,-94.363 ; -148.843,-94.268 cw(c-148.835,-95.767) -148.311,-94.363 ; -148.311,-94.363 -148.08,-94.363 ; -148.311,-94.363 -148.08,-94.363 ; -148.311,-94.363 -148.08,-94.363 ; -148.08,-94.363 -147.153,-93.436 ; -147.153,-93.436 -147.618,-90.848 -147.618,-90.638 -145.508,-88.528 -145.508,-83.626 R35.1@-145.572,-83.626 ; -147.153,-93.436 -147.153,-94.021 -146.035,-95.139 -145.819,-95.139 -118.627,-95.139 -118.33,-94.841 -118.33,-85.353 ; R35.1@-145.572,-83.626 R35.1@-145.393,-83.448 R35.1@-145.025,-83.448 ; R35.1@-145.025,-83.626 R35.1@-145.025,-83.448 ; R35.1@-145.025,-83.626 R35.1@-145.025,-83.448 ; R35.1@-145.025,-83.626 R35.1@-145.025,-83.448 ; R92.1@-128.366,-28.914 R93.1@-125.721,-28.914 R94.1@-122.673,-28.914 R95.1@-119.625,-28.914 R96.1@-116.577,-28.914 -116.301,-28.914 -115.434,-29.781 -115.434,-31.038 -115.243,-31.229 -115.243,-32.9 -115.434,-33.091 -115.434,-34.35 -120.057,-38.973 -120.057,-47.425 ; R27.1@-121.403,-83.626 -120.056,-83.626 ; -120.057,-64.982 -120.057,-47.425 ; -120.056,-83.626 R26.1@-119.47,-84.212 ; -120.056,-83.626 R26.1@-118.609,-83.626 R25.1@-115.688,-83.626 -113.148,-83.626 -112.894,-83.372 R48.1@-110.354,-83.372 R47.1@-107.433,-83.372 R46.1@-104.512,-83.372 R45.1@-101.591,-83.372 R44.1@-98.924,-83.372 ; R26.1@-119.47,-84.212 -118.33,-85.353 ; R26.1@-119.47,-84.212 -118.33,-85.353 ; R26.1@-119.47,-84.212 -118.33,-85.353 ; R46.1@-105.338,-82.822 R46.1@-103.686,-82.822 ; R46.1@-105.338,-82.822 R46.1@-103.686,-82.822 ; R46.1@-105.338,-82.822 R46.1@-103.686,-82.822 ; R46.1@-103.686,-82.822 -102.803,-81.939 -101.139,-81.939 -100.016,-80.816 ; -100.016,-80.816 -100.016,-82.28 R44.1@-98.924,-83.372 ; -100.016,-80.816 -100.016,-78.216 -101.972,-76.26 -101.972,-71.47 -102.313,-71.129 -102.442,-71.129 -103.115,-70.456 -103.115,-69.391 -103.369,-69.137 -103.369,-66.201 -102.861,-65.693 -102.861,-61.935 -101.768,-60.842 -79.174,-60.842 -78.23,-61.786 -75.781,-61.786 -75.632,-61.935 -75.632,-80.832 -75.429,-81.035 -75.429,-83.372 ; R40.1@-86.986,-82.949 R40.1@-86.562,-83.372 ; R40.1@-86.986,-82.949 R40.1@-86.562,-83.372 ; R40.1@-86.986,-82.949 R40.1@-86.562,-83.372 ; -85.614,-28.787 -85.919,-29.092 -85.919,-33.004 -83.43,-33.004 ; -83.43,-33.004 -80.382,-33.004 -80.065,-32.687 -80.065,-31.102 -80.001,-31.038 -80.001,-30.806 -79.798,-30.603 ; -79.798,-30.603 -79.798,-28.787 ; -79.798,-30.603 -79.798,-28.787 ; -79.798,-30.603 -79.798,-28.787 ; -79.798,-28.787 R84.1@-78.731,-28.787 -75.683,-28.787 -75.302,-29.168 ; -75.429,-83.372 -74.285,-83.372 -74.031,-83.118 R60.1@-72.889,-83.118 R59.1@-69.841,-83.118 -69.565,-83.118 -69.015,-82.568 -69.015,-81.311 -68.507,-80.803 -68.507,-79.512 -68.285,-79.29 -68.276,-79.29 -68.127,-79.141 -68.127,-79.132 -67.904,-78.909 -65.682,-78.909 -65.142,-79.449 -65.142,-82.864 -64.888,-83.118 ; -75.302,-29.168 R62.1@-69.333,-29.168 ; -75.302,-29.168 R62.1@-69.333,-29.168 ; -75.302,-29.168 R62.1@-69.333,-29.168 ; R62.1@-69.333,-29.168 R63.1@-66.412,-29.168 R64.1@-63.237,-29.168 R65.1@-60.316,-29.168 -59.765,-29.718 -59.486,-29.718 -59.237,-29.967 -59.237,-30.213 -58.982,-30.469 -58.982,-32.941 -58.538,-33.385 -55.744,-33.385 ; -64.888,-83.118 R57.1@-63.745,-83.118 R56.1@-61.408,-83.118 ; R56.1@-61.408,-83.118 R56.1@-61.408,-82.758 ; R56.1@-61.408,-83.118 R56.1@-61.408,-82.758 ; R56.1@-61.408,-83.118 R56.1@-61.408,-82.758 ; R56.1@-61.408,-82.758 -61.523,-82.642 -61.882,-82.642 -62.031,-82.493 -62.031,-79.132 -61.808,-78.909 -59.159,-78.909 ; -59.159,-78.909 -59.151,-78.901 -58.944,-78.901 ; -58.944,-78.901 -57.446,-77.403 ; -57.446,-77.403 U5.24@-57.446,-73.307 ; -57.446,-77.403 U5.24@-57.446,-73.307 ; -57.446,-77.403 U5.24@-57.446,-73.307 ; -55.744,-33.385 -53.309,-33.385 -53.14,-33.215 -53.14,-31.483 -53.151,-31.472 -53.151,-30.446 -52.899,-30.194 -52.899,-29.168 ; -52.899,-29.168 R68.1@-51.553,-29.168 -50.207,-29.168
  Layer 1 w0.254: v1(-160.519,-81.543) -160.519,-76.736 -160.392,-76.609 -160.392,-72.272 -156.836,-68.716 -148.341,-68.716 -147.452,-69.605 -138.957,-69.605 -138.25,-70.312 -137.5,-70.312 -135.159,-72.653 -133.809,-72.653 -133.428,-73.034 -132.793,-73.034 -132.412,-73.415 ; v1(-140.453,-30.498) -138.626,-30.498 -130.293,-38.831 -130.293,-41.792 -130.039,-42.046 -130.039,-48.276 -138.929,-57.166 -138.929,-57.834 -128.682,-68.081 -125.848,-68.081 -124.324,-69.605 -124.324,-72.486 -125.253,-73.415 -132.412,-73.415 ; v1(-121.245,-82.042) -126.189,-77.098 -128.118,-77.098 -129.045,-78.025 -129.886,-78.025 -131.149,-76.762 -131.149,-74.678 -132.412,-73.415 ; v1(-47.616,-59.699) -49.013,-61.096 -49.013,-69.351 -44.127,-74.237 -44.127,-74.908 v1(-43.933,-75.102)
  Layer 2 w0.254: v1(-92.67,-81.788) -90.604,-80.328 -90.538,-80.282 -88.926,-80.282 -88.382,-80.519 -87.113,-81.788 v1(-86.986,-81.788) ; PS2.3@-69.206,-59.227 -68.071,-58.092 -63.313,-58.092 -59.547,-61.858 -52.442,-61.858 -50.283,-59.699 v1(-47.616,-59.699)
  Bottom Layer w0.254: v1(-127.372,-82.042) -126.279,-80.949 -124.564,-80.949 -123.665,-80.05 -123.665,-79.411 -121.403,-77.149 ; v1(-121.245,-82.042) -121.403,-81.884 -121.403,-77.149 ; v1(-91.939,-88.274) -91.664,-88.274 -91.283,-87.893 -82.744,-87.893 -69.206,-74.355 PS2.3@-69.206,-59.227 -81.526,-59.227 -81.741,-59.443 -106.313,-59.443 -121.403,-74.533 -121.403,-77.149
NetC24_1: C24.1 PS1.3 R124.2 U7.3 U7.5 U9.1 | length 43.3
  Top Layer w0.254: U9.1@-19.809,-52.841 -16.523,-52.841 -16.319,-52.637 -16.319,-50.075 -16.096,-49.852 ; C24.1@-17.644,-36.738 -17.474,-36.908 -17.474,-37.822 -16.617,-38.679 ; R124.2@-16.49,-42.554 -16.44,-42.554 -15.739,-43.255 -15.739,-47.545 -16.319,-48.125 -16.319,-49.541 -16.096,-49.764 -15.811,-49.764 -15.767,-49.808 ; R124.2@-16.617,-42.554 -16.617,-38.679 ; R124.2@-16.617,-42.554 -16.617,-38.679 ; R124.2@-16.617,-42.554 -16.617,-38.679 ; -15.767,-49.808 -14.469,-49.808 ; -15.767,-49.808 -14.469,-49.808 ; -15.767,-49.808 -14.469,-49.808 ; -14.469,-49.808 -13.819,-50.458 ; -13.819,-50.458 U7.5@-12.463,-50.458 ; -13.819,-50.458 U7.5@-12.463,-50.458 ; -13.819,-50.458 U7.5@-12.463,-50.458 ; U7.5@-12.463,-50.458 -10.044,-52.877 ; -10.044,-52.877 PS1.3@-8.881,-52.877 -10.044,-52.877
NetD1_1: D1.1 U10.39 | length 9
  Top Layer w0.15: U10.39@-141.39,-59.566 -132.607,-59.566 D1.1@-132.486,-59.445
NetD1_2: D1.2 R122.2 | length 3.8
  Top Layer w0.254: D1.2@-130.386,-59.445 -128.693,-59.445 -128.439,-59.699 R122.2@-126.7,-59.699
NetD2_1: D2.1 U10.40 | length 9.9
  Top Layer w0.15: U10.40@-141.39,-59.066 -133.712,-59.066 -133.415,-58.769 -133.415,-58.709 -133.222,-58.516 -133.162,-58.516 D2.1@-132.186,-57.54
NetD2_2: D2.2 R123.2 | length 3.7
  Top Layer w0.254: D2.2@-130.686,-57.54 R123.2@-126.954,-57.54
NetF1_1: F1.1 J6.1 | length 24.7
  Top Layer w0.254: F1.1@-12.44,-68.462 -12.44,-75.874 v1(-11.167,-77.147)
  Layer 1 w0.254: v1(-11.167,-77.147) -11.167,-75.956 -4.623,-69.412 -3.236,-69.412 -2.661,-68.837 -2.661,-67.45 J6.1@-1.642,-66.431
NetJ1_1: J1.1 R1.2 U1.9 | length 35.9
  Top Layer w0.254: U1.9@-210.103,-69.377 -207.683,-69.377 -207.403,-69.097 v1(-207.128,-69.097) ; v1(-192.904,-81.552) R1.2@-192.904,-80.18 ; R1.2@-192.841,-79.968 R1.2@-193.117,-79.968 ; R1.2@-193.117,-79.968 R1.2@-192.904,-80.18 ; R1.2@-193.117,-79.968 R1.2@-192.904,-80.18 ; R1.2@-193.117,-79.968 R1.2@-192.904,-80.18
  Layer 1 w0.254: v1(-207.128,-69.097) -194.555,-81.67 -194.555,-81.71 ; J1.1@-197.857,-91.017 -194.555,-87.715 -194.555,-81.71 ; v1(-192.904,-81.552) -193.062,-81.71 -194.555,-81.71
NetJ1_3: J1.3 R2.2 U1.8 | length 77.6
  Top Layer w0.254: v1(-211.95,-71.291) -211.95,-71.016 -211.395,-70.461 -211.395,-70.23 -211.278,-70.113 ; U1.8@-210.103,-70.027 -211.192,-70.027 -211.278,-70.113 ; R2.2@-195.762,-79.968 -195.762,-70.481 -199.864,-66.379 -212.081,-66.379 -212.335,-66.633 -212.335,-68.163 -212.848,-68.676 -212.848,-69.518 -212.253,-70.113 -211.278,-70.113
  Bottom Layer w0.254: v1(-211.95,-71.291) -211.95,-71.566 -211.624,-71.892 -211.624,-82.004 -211.624,-82.014 -211.637,-82.342 -210.684,-83.296 -197.755,-83.296 -196.634,-84.417 -196.634,-89.687 -196.783,-89.836 ; J1.3@-201.845,-91.017 -200.699,-90.182 ; -200.698,-90.181 cw(c-199.864,-91.017) -199.037,-90.174 ccw(c-198.86,-89.991) -198.684,-90.174 ; -198.684,-90.174 cw(c-197.857,-91.017) -197.857,-89.836 ; -198.684,-90.174 cw(c-197.857,-91.017) -197.857,-89.836 ; -198.684,-90.174 cw(c-197.857,-91.017) -197.857,-89.836 ; -197.857,-89.836 -196.783,-89.836 ; -197.857,-89.836 -196.783,-89.836 ; -197.857,-89.836 -196.783,-89.836
NetJ1_5: J1.5 R3.2 U1.7 | length 119.9
  Top Layer w0.254: U1.7@-210.103,-70.677 -206.31,-70.677 -198.771,-78.216 R3.2@-198.771,-79.688 ; R3.2@-198.683,-79.968 R3.2@-198.771,-79.968 ; v1(-192.523,-77.885) -193.056,-77.885 -194.199,-79.028 -194.199,-80.574 -194.66,-81.035 -197.425,-81.035 ; R3.2@-198.771,-79.968 R3.2@-198.771,-79.688 ; R3.2@-198.771,-79.968 R3.2@-198.771,-79.688 ; R3.2@-198.771,-79.968 R3.2@-198.771,-79.688 ; R3.2@-198.771,-79.688 -197.425,-81.035 ; R3.2@-198.771,-79.688 -197.425,-81.035 ; R3.2@-198.771,-79.688 -197.425,-81.035
  Bottom Layer w0.254: J1.5@-205.858,-91.017 -205.658,-91.017 -204.823,-90.183 -204.449,-89.808 -203.919,-89.808 -203.39,-89.808 -203.025,-90.174 ccw(c-202.848,-89.991) -202.671,-90.174 ; v1@-192.757,-78.094 -197.451,-82.788 -210.474,-82.788 -210.934,-82.327 -210.934,-70.87 -211.529,-70.275 -212.371,-70.275 -212.85,-70.755 -214.401,-70.755 -214.996,-71.35 -214.996,-72.192 -213.941,-73.247 -213.543,-73.247 -212.487,-74.303 -212.487,-82.211 -210.894,-83.804 -197.966,-83.804 -197.142,-84.627 -197.142,-89.179 -197.291,-89.328 ; -202.671,-90.174 cw(c-201.845,-91.017) -201.387,-89.928 ; -202.671,-90.174 cw(c-201.845,-91.017) -201.387,-89.928 ; -202.671,-90.174 cw(c-201.845,-91.017) -201.387,-89.928 ; -201.387,-89.928 -200.681,-89.539 ; -201.387,-89.928 -200.681,-89.539 ; -201.387,-89.928 -200.681,-89.539 ; -200.681,-89.539 -200.679,-89.538 ; -200.681,-89.539 -200.679,-89.538 ; -200.681,-89.539 -200.679,-89.538 ; -200.679,-89.538 cw(c-199.864,-91.017) -199.091,-89.515 ; -200.679,-89.538 cw(c-199.864,-91.017) -199.091,-89.515 ; -200.679,-89.538 cw(c-199.864,-91.017) -199.091,-89.515 ; -199.091,-89.515 -199,-89.562 -198.949,-89.568 -198.844,-89.556 ; -198.844,-89.556 -198.366,-89.407 ; -198.844,-89.556 -198.366,-89.407 ; -198.844,-89.556 -198.366,-89.407 ; -198.366,-89.407 cw(c-197.857,-91.017) -197.857,-89.328 ; -198.366,-89.407 cw(c-197.857,-91.017) -197.857,-89.328 ; -198.366,-89.407 cw(c-197.857,-91.017) -197.857,-89.328 ; -197.857,-89.328 -197.291,-89.328 ; -197.857,-89.328 -197.291,-89.328 ; -197.857,-89.328 -197.291,-89.328
NetJ1_7: J1.7 R4.2 U1.6 | length 57.1
  Top Layer w0.254: U1.6@-210.103,-71.327 -206.378,-71.327 -202.303,-75.402 -202.303,-79.417 -201.753,-79.968 R4.2@-201.477,-79.968 -201.54,-80.03 v1(-201.54,-81.552)
  Layer 1 w0.254: J1.7@-217.847,-91.017 -218.332,-91.502 -218.542,-91.502 -218.617,-91.428 -218.691,-91.353 -218.691,-91.248 ; v1(-201.54,-81.552) -201.734,-81.357 -202.234,-81.357 -207.636,-75.955 -211.982,-75.955 -224.883,-88.856 -224.883,-89.855 -224.734,-90.004 -224.523,-90.004 -224.288,-89.914 cw(c-223.867,-91.017) -223.04,-90.174 ccw(c-222.863,-89.991) -222.687,-90.174 cw(c-221.86,-91.017) -221.033,-90.174 ccw(c-220.857,-89.991) -220.68,-90.174 cw(c-219.853,-91.017) -218.691,-91.227 ; -218.691,-91.248 -218.691,-91.227 ; -218.691,-91.248 -218.691,-91.227 ; -218.691,-91.248 -218.691,-91.227
NetJ1_9: J1.9 R5.2 U1.5 | length 35.7
  Top Layer w0.254: U1.5@-210.103,-71.977 -206.447,-71.977 -204.334,-74.09 -204.334,-79.903 R5.2@-204.398,-79.968 -204.334,-80.032 v1(-204.334,-81.543)
  Layer 2 w0.254: J1.9@-221.86,-91.017 -220.632,-89.789 -212.377,-89.789 -204.334,-81.746 v1(-204.334,-81.543)
NetJ1_11: J1.11 R6.2 U1.4 | length 37.7
  Top Layer w0.254: U1.4@-210.103,-72.627 -206.515,-72.627 -204.842,-74.3 -204.842,-74.979 -206.493,-76.63 -206.493,-79.417 -207.044,-79.968 R6.2@-207.319,-79.968 -207.063,-79.968 -206.512,-80.518 v1(-206.512,-81.552)
  Layer 2 w0.254: v1(-206.512,-81.552) -206.512,-79.849 -206.363,-79.7 -201.78,-79.7 -197.857,-83.624 -197.857,-89.71 -197.783,-89.784 -197.723,-89.844 -197.36,-89.844 -197.022,-90.182 -196.676,-90.528 -196.676,-91.017 -196.676,-91.506 -197.022,-91.852 -197.202,-92.032 -197.202,-92.212 -197.857,-92.867 J1.11@-197.857,-93.227
NetJ1_13: J1.13 R7.2 U1.3 | length 47.1
  Top Layer w0.254: R7.2@-210.24,-79.968 -210.397,-79.811 -211.425,-79.811 -211.827,-79.409 -211.827,-79.132 -212.05,-78.909 -212.327,-78.909 -212.335,-78.901 ; U1.3@-210.103,-73.277 -211.438,-73.277 -212.327,-74.166 -212.327,-78.894 -212.335,-78.901 ; J1.13@-201.845,-93.227 -201.534,-93.227 -200.353,-94.408 -197.368,-94.408 -196.676,-93.716 -196.676,-92.738 -196.976,-92.438 -196.976,-91.807 -196.676,-91.506 -196.676,-90.528 -197.533,-89.671 -203.826,-89.671 -208.144,-85.353 -208.144,-84.464 -208.398,-84.21 -208.757,-84.21 -208.906,-84.061 -208.906,-82.283 -209.129,-82.06 -213.495,-82.06 -214.519,-81.035 -214.519,-78.901 -212.335,-78.901
NetJ1_15: J1.15 R8.2 U1.2 | length 45.4
  Top Layer w0.254: R8.2@-213.161,-79.968 -212.61,-80.518 -212.111,-80.518 -211.594,-81.035 -208.906,-81.035 -208.906,-77.882 -208.966,-77.822 -208.966,-77.419 v1(-209.16,-77.225) ; U1.2@-210.103,-73.927 -211.37,-73.927 -211.37,-74.939 ; -211.37,-74.939 v1@-209.122,-77.187 ; -211.37,-74.939 v1@-209.122,-77.187 ; -211.37,-74.939 v1@-209.122,-77.187 ; -211.37,-74.939 v1@-209.122,-77.187 ; -211.37,-74.939 v1@-209.122,-77.187
  Layer 1 w0.254: v1(-209.16,-77.225) -205.496,-80.889 -205.496,-85.635 -207.039,-87.178 -207.039,-92.046 J1.15@-205.858,-93.227
NetJ1_17: J1.17 R9.2 U1.23 | length 38.7
  Top Layer w0.254: R9.2@-216.082,-79.968 -216.082,-75.307 -215.596,-74.821 -215.596,-74.333 -215.94,-73.989 -216.009,-73.989 -216.04,-73.958 -216.822,-73.958 U1.23@-216.853,-73.927 -215.284,-73.927 -214.884,-74.326 -213.901,-74.326 v1(-213.868,-74.359)
  Bottom Layer w0.254: v1(-213.868,-74.359) -217.964,-81.245 -217.999,-81.305 -217.999,-81.375 -217.999,-82.61 -209.795,-90.814 ; J1.17@-209.846,-93.227 J1.17@-209.795,-93.227 ; J1.17@-209.795,-93.227 -209.795,-90.814 ; J1.17@-209.795,-93.227 -209.795,-90.814 ; J1.17@-209.795,-93.227 -209.795,-90.814
NetJ1_19: J1.19 R10.2 U1.22 | length 37.2
  Top Layer w0.254: U1.22@-216.853,-73.277 -213.478,-73.277 -212.879,-72.678 v1(-212.64,-72.678) ; J1.19@-213.859,-93.227 -213.681,-93.049 -213.681,-89.468 -217.517,-85.632 -217.517,-81.466 -218.178,-80.804 -218.178,-80.518 -218.729,-79.968 R10.2@-219.015,-79.968 ; v1(-219.015,-81.552) R10.2@-219.015,-79.968 ; v1(-219.015,-81.552) R10.2@-219.015,-79.968 ; v1(-219.015,-81.552) R10.2@-219.015,-79.968
  Layer 1 w0.254: v1(-219.015,-81.552) -219.015,-77.809 -214.549,-73.343 -213.412,-73.343 -212.748,-72.678 v1(-212.64,-72.678)
NetJ1_21: J1.21 R11.2 U1.21 | length 54.7
  Top Layer w0.254: v1(-221.987,-81.552) -221.987,-80.03 R11.2@-221.924,-79.968 ; U1.21@-216.853,-72.627 -214.741,-72.627 -213.98,-71.866 v1(-213.98,-71.771)
  Layer 2 w0.254: v1(-221.987,-81.552) -221.987,-88.522 -222.136,-88.67 -225.013,-88.67 -225.162,-88.819 -225.162,-94.59 -225.013,-94.739 -223.534,-94.739 -223.527,-94.732 -223.058,-94.732 -223.036,-94.754 -218.688,-94.754 -218.085,-94.151 -218.085,-93.465 J1.21@-217.847,-93.227 ; v1(-213.98,-71.771) -214.255,-71.771 -214.593,-72.11 -220.526,-72.11 -224.327,-75.911 -224.327,-79.187 ; -224.327,-79.187 v1@-221.974,-81.539 ; -224.327,-79.187 v1@-221.974,-81.539 ; -224.327,-79.187 v1@-221.974,-81.539
NetJ1_23: J1.23 R12.2 U1.20 | length 32.1
  Top Layer w0.254: v1(-224.654,-81.552) -224.654,-80.159 R12.2@-224.845,-79.968 -224.845,-76.707 -220.116,-71.977 U1.20@-216.853,-71.977
  Bottom Layer w0.254: v1(-224.654,-81.552) -225.672,-82.57 -225.672,-89.691 -225.672,-90.893 -224.543,-92.022 -224.543,-92.233 -225.048,-92.738 -225.048,-93.716 -224.356,-94.408 -223.377,-94.408 -222.196,-93.227 J1.23@-221.86,-93.227
NetJ2_1: J2.1 R13.2 U2.9 | length 101.2
  Top Layer w0.254: v1(-227.766,-81.552) R13.2@-227.766,-79.968 ; U2.9@-172.511,-69.25 -172.48,-69.281 -171.401,-69.281 -171.055,-69.627 v1(-170.78,-69.627)
  Layer 2 w0.254: v1(-227.766,-81.552) -227.766,-78.632 -214.929,-65.795 -204.29,-65.795 -204.036,-65.541 -172.203,-65.541 -170.044,-67.7 -170.044,-68.495 -170.17,-68.621 -170.17,-68.801 -170.78,-69.41 v1(-170.78,-69.627)
  Bottom Layer w0.254: v1(-170.78,-69.627) -170.748,-69.659 -170.748,-75.284 -171.749,-76.286 -171.749,-76.638 -171.749,-76.728 -171.616,-76.862 -166.361,-79.689 -158.576,-87.474 -159.097,-87.995 -159.097,-91.017 J2.1@-159.071,-91.068
NetJ2_3: J2.3 R14.2 U2.8 | length 46.1
  Top Layer w0.254: v1(-175.025,-70.424) -174.751,-70.424 -174.242,-69.915 -172.526,-69.915 U2.8@-172.511,-69.9 ; R14.2@-157.598,-79.968 -156.43,-79.968 -156.43,-78.393 v1(-156.455,-78.368)
  Layer 1 w0.254: J2.3@-163.059,-91.068 -156.455,-84.464 v1(-156.455,-78.368)
  Bottom Layer w0.254: v1(-175.025,-70.424) -172.606,-70.424 -172.457,-70.275 -172.457,-68.961 -171.379,-67.884 -170.368,-67.884 -164.329,-73.923 -160.849,-73.923 -158.813,-75.959 -158.813,-76.645 -158.049,-77.409 -157.414,-77.409 v1(-156.455,-78.368)
NetJ2_5: J2.5 R15.2 U2.7 | length 41
  Top Layer w0.254: U2.7@-172.511,-70.55 -172.48,-70.581 -171.422,-70.581 -171.28,-70.723 -171.169,-70.834 -169.762,-70.834 -169.422,-70.494 -167.123,-70.494 -161.027,-76.59 -161.027,-79.46 R15.2@-160.519,-79.968 -160.668,-80.116 -160.668,-80.327 -160.519,-80.476 -160.31,-80.525 -160.098,-80.527 -159.503,-81.122 -159.503,-81.911 -159.354,-82.06 -156.487,-82.06 -156.264,-82.283 -156.264,-83.954 -156.487,-84.177 -163.465,-84.177 -163.56,-84.272 -167.351,-90.377 -167.351,-90.509 J2.5@-167.072,-91.068
NetJ2_7: J2.7 R16.2 U2.6 | length 82.5
  Top Layer w0.254: v1(-174.454,-71.836) -174.404,-71.836 -173.768,-71.2 U2.6@-172.511,-71.2 -172.48,-71.231 -171.49,-71.231 -171.379,-71.342 -169.552,-71.342 -169.212,-71.002 -167.333,-71.002 -163.44,-74.895 R16.2@-163.44,-79.968
  Bottom Layer w0.254: J2.7@-179.061,-91.068 J2.7@-179.056,-91.017 ; v1(-174.454,-71.836) -174.477,-71.86 -175.47,-71.86 -176.521,-72.911 -176.521,-80.063 -182.976,-86.518 -184.413,-86.518 -185.008,-87.113 -185.008,-87.955 -184.413,-88.55 -183.571,-88.55 -182.976,-87.955 -175.469,-80.447 -175.469,-76.862 -174.873,-76.267 -174.032,-76.267 -173.437,-76.862 -173.437,-79.852 -182.998,-89.413 -182.998,-89.708 -182.849,-89.857 -182.59,-89.857 -182.273,-90.174 ccw(c-182.096,-89.991) -181.92,-90.174 cw(c-181.093,-91.017) -179.919,-90.883 -179.86,-90.943 J2.7@-179.786,-91.017 ; J2.7@-179.786,-91.017 J2.7@-179.056,-91.017 ; J2.7@-179.786,-91.017 J2.7@-179.056,-91.017 ; J2.7@-179.786,-91.017 J2.7@-179.056,-91.017
NetJ2_9: J2.9 R17.2 U2.5 | length 56.6
  Top Layer w0.254: U2.5@-172.511,-71.85 -172.48,-71.881 -168.784,-71.881 v1(-168.647,-72.018) -168.479,-71.85 -167.204,-71.85 -163.948,-75.106 -163.948,-77.83 -166.085,-79.968 R17.2@-166.361,-79.968
  Layer 1 w0.254: v1(-183.992,-87.534) -183.798,-87.728 -183.798,-88.512 -183.074,-89.236 J2.9@-183.074,-91.068
  Bottom Layer w0.254: v1(-183.992,-87.534) -182.869,-87.129 -175.977,-80.237 -175.977,-74.873 -176.013,-74.836 -176.013,-73.121 -175.672,-72.78 -174.83,-72.78 -174.235,-73.375 -174.235,-73.427 -174.235,-73.481 -172.054,-75.662 -171.844,-75.662 -171.256,-75.074 -171.256,-72.41 -171.796,-71.87 -171.796,-69.168 -171.02,-68.392 -170.579,-68.392 -169.732,-69.239 -169.732,-69.397 -169.521,-69.608 -169.521,-71.275 -168.778,-72.018 v1(-168.647,-72.018)
NetJ2_11: J2.11 R18.2 U2.4 | length 84.2
  Top Layer w0.254: v1(-174.453,-77.283) v1@-174.062,-76.893 ; U2.4@-172.511,-72.5 -173.681,-72.5 -174.033,-72.852 -174.758,-72.852 -174.83,-72.78 -175.672,-72.78 -176.521,-73.629 -176.521,-74.852 -175.871,-75.502 -175.454,-75.502 ; R18.2@-169.282,-79.968 -169.968,-79.968 -170.12,-79.815 -170.12,-79.123 -172.35,-76.893 v1@-174.062,-76.893 ; -175.454,-75.502 v1@-174.062,-76.893 ; -175.454,-75.502 v1@-174.062,-76.893 ; -175.454,-75.502 v1@-174.062,-76.893
  Bottom Layer w0.254: -185.916,-94.113 cw(c-185.081,-93.278) -185.834,-92.368 ccw(c-185.997,-92.173) -185.834,-91.978 ; -185.916,-94.113 -184.559,-95.47 -179.796,-95.47 -179.713,-95.386 -161.256,-95.386 ; v1(-174.453,-77.283) -174.453,-80.149 -183.502,-89.198 -184.882,-89.198 ; J2.11@-159.071,-93.278 J2.11@-159.097,-93.227 ; -185.916,-90.233 cw(c-185.343,-90.806) -185.915,-90.232 ; -185.916,-90.233 ccw(c-185.081,-91.068) -185.834,-91.978 ; -185.916,-90.233 cw(c-185.343,-90.806) -185.915,-90.232 ; -185.916,-90.233 cw(c-185.343,-90.806) -185.915,-90.232 ; -185.915,-90.232 -184.882,-89.198 ; -185.915,-90.232 -184.882,-89.198 ; -185.915,-90.232 -184.882,-89.198 ; -185.834,-91.978 cw(c-185.081,-91.068) -185.916,-90.233 ccw(c-185.081,-91.068) -185.834,-91.978 ; -161.256,-95.386 J2.11@-159.097,-93.227 ; -161.256,-95.386 J2.11@-159.097,-93.227 ; -161.256,-95.386 J2.11@-159.097,-93.227
NetJ2_13: J2.13 R19.2 U2.3 | length 43.5
  Top Layer w0.254: v1(-174.997,-74.153) -174.776,-74.153 -174.168,-73.546 -173.988,-73.546 -173.623,-73.181 -172.542,-73.181 U2.3@-172.511,-73.15 ; R19.2@-172.203,-79.968 -172.04,-80.131 v1(-172.04,-81.543)
  Layer 2 w0.254: v1(-172.04,-81.543) -167.446,-86.137 -162.306,-86.137 -157.915,-90.528 -157.915,-93.716 -158.607,-94.408 -161.903,-94.408 ; J2.13@-163.046,-93.265 -161.903,-94.408 ; J2.13@-163.046,-93.265 -161.903,-94.408 ; J2.13@-163.046,-93.265 -161.903,-94.408
  Bottom Layer w0.254: v1(-174.997,-74.153) -174.722,-74.153 -174.222,-74.653 -174.147,-74.653 -173.446,-75.355 -173.446,-75.812 -172.04,-77.218 v1(-172.04,-81.543)
NetJ2_15: J2.15 R20.2 U2.2 | length 44
  Top Layer w0.254: R20.2@-175.124,-79.968 R20.2@-175.073,-79.968 ; U2.2@-172.511,-73.8 -169.999,-73.8 -169.868,-73.669 -166.103,-73.669 -164.476,-75.296 -164.476,-75.507 -165.531,-76.562 -166.683,-76.562 -167.936,-77.815 -167.936,-81.026 ; v1(-166.361,-81.543) -166.636,-81.543 -167.153,-81.026 -167.936,-81.026 ; R20.2@-175.073,-79.968 -175.073,-78.901 ; R20.2@-175.073,-79.968 -175.073,-78.901 ; R20.2@-175.073,-79.968 -175.073,-78.901 ; -175.073,-78.901 -171.06,-78.901 -170.628,-79.333 -170.628,-80.791 -170.384,-81.035 -167.945,-81.035 -167.936,-81.026
  Layer 1 w0.254: J2.15@-167.072,-93.278 -167.098,-93.227 -167.098,-92.324 -167.172,-92.25 -167.231,-92.191 -167.594,-92.191 -168.279,-91.506 -168.279,-90.528 -167.933,-90.182 -167.594,-89.844 -167.246,-89.844 -166.915,-89.512 -166.915,-82.372 -166.361,-81.818 v1(-166.361,-81.543)
NetJ2_17: J2.17 R21.2 U2.23 | length 28.5
  Top Layer w0.254: U2.23@-179.261,-73.8 -180.204,-73.8 -180.56,-74.156 -180.56,-75.599 -179.29,-76.869 -179.29,-79.968 R21.2@-178.045,-79.968 R21.2@-177.969,-79.968 ; J2.17@-171.06,-93.278 -171.06,-89.519 -176.699,-83.88 -176.699,-82.051 -177.969,-80.781 ; -177.969,-80.781 R21.2@-177.969,-79.968 ; -177.969,-80.781 R21.2@-177.969,-79.968 ; -177.969,-80.781 R21.2@-177.969,-79.968 ; -177.969,-80.781 R21.2@-177.969,-79.968 ; -177.969,-80.781 R21.2@-177.969,-79.968
NetJ2_19: J2.19 R22.2 U2.22 | length 73.4
  Top Layer w0.254: R22.2@-180.966,-79.968 R22.2@-181.525,-79.968 ; v1(-176.648,-71.51) -176.842,-71.704 -176.842,-72.47 -177.108,-72.736 -177.108,-72.962 -177.296,-73.15 U2.22@-179.261,-73.15 -180.306,-73.15 -181.525,-74.369 ; R22.2@-181.525,-79.968 -181.525,-74.369 ; R22.2@-181.525,-79.968 -181.525,-74.369 ; R22.2@-181.525,-79.968 -181.525,-74.369 ; R22.2@-181.525,-79.968 -181.525,-74.369 ; R22.2@-181.525,-79.968 -181.525,-74.369
  Layer 1 w0.254: v1(-176.648,-71.51) -176.597,-71.561 -176.597,-89.855 -176.27,-90.182 ; J2.19@-175.073,-93.278 -175.077,-93.249 -176.269,-92.056 ; -176.269,-92.056 -176.269,-91.852 ; -176.269,-92.056 -176.269,-91.852 ; -176.269,-92.056 -176.269,-91.852 ; -176.269,-92.056 -176.269,-91.852 ; -176.269,-92.056 -176.269,-91.852 ; -176.269,-91.852 ccw(c-177.105,-91.017) -176.27,-90.182 ; -176.269,-91.852 ccw(c-177.105,-91.017) -176.27,-90.182 ; -176.269,-91.852 ccw(c-177.105,-91.017) -176.27,-90.182 ; -176.269,-91.852 ccw(c-177.105,-91.017) -176.27,-90.182 ; -176.269,-91.852 ccw(c-177.105,-91.017) -176.27,-90.182 ; -176.269,-91.852 ccw(c-177.105,-91.017) -176.27,-90.182 ; -176.269,-91.852 ccw(c-177.105,-91.017) -176.27,-90.182 ; -176.269,-91.852 ccw(c-177.105,-91.017) -176.27,-90.182 ; -176.269,-91.852 ccw(c-177.105,-91.017) -176.27,-90.182
NetJ2_21: J2.21 R23.2 U2.21 | length 36.6
  Top Layer w0.254: R23.2@-183.887,-79.968 -183.887,-73.542 v1@-182.845,-72.5 ; v1(-182.414,-72.907) -182.414,-72.78 v1@-182.134,-72.5 ; U2.21@-179.261,-72.5 v1@-182.134,-72.5 ; v1@-182.845,-72.5 v1@-182.414,-72.5 ; v1@-182.845,-72.5 v1@-182.134,-72.5 ; v1@-182.845,-72.5 v1@-182.134,-72.5 ; v1@-182.845,-72.5 v1@-182.134,-72.5 ; v1@-182.845,-72.5 v1@-182.414,-72.5 ; v1@-182.414,-72.5 v1@-182.134,-72.5 ; v1@-182.414,-72.5 v1@-182.134,-72.5
  Layer 1 w0.254: v1(-182.414,-72.907) -182.414,-87.969 -180.077,-90.306 -180.077,-92.236 -179.086,-93.227 J2.21@-179.061,-93.278